# Altium PCB PCB1.PcbDoc
Units mil, origin at the board's own origin, x right, y up, seen from the top; angles counter-clockwise.
Board outline 3937.01 x 2952.76 mil, 2 copper layers (Top Layer, Bottom Layer); 25 components, 22 nets, 111 pads, 4 vias.
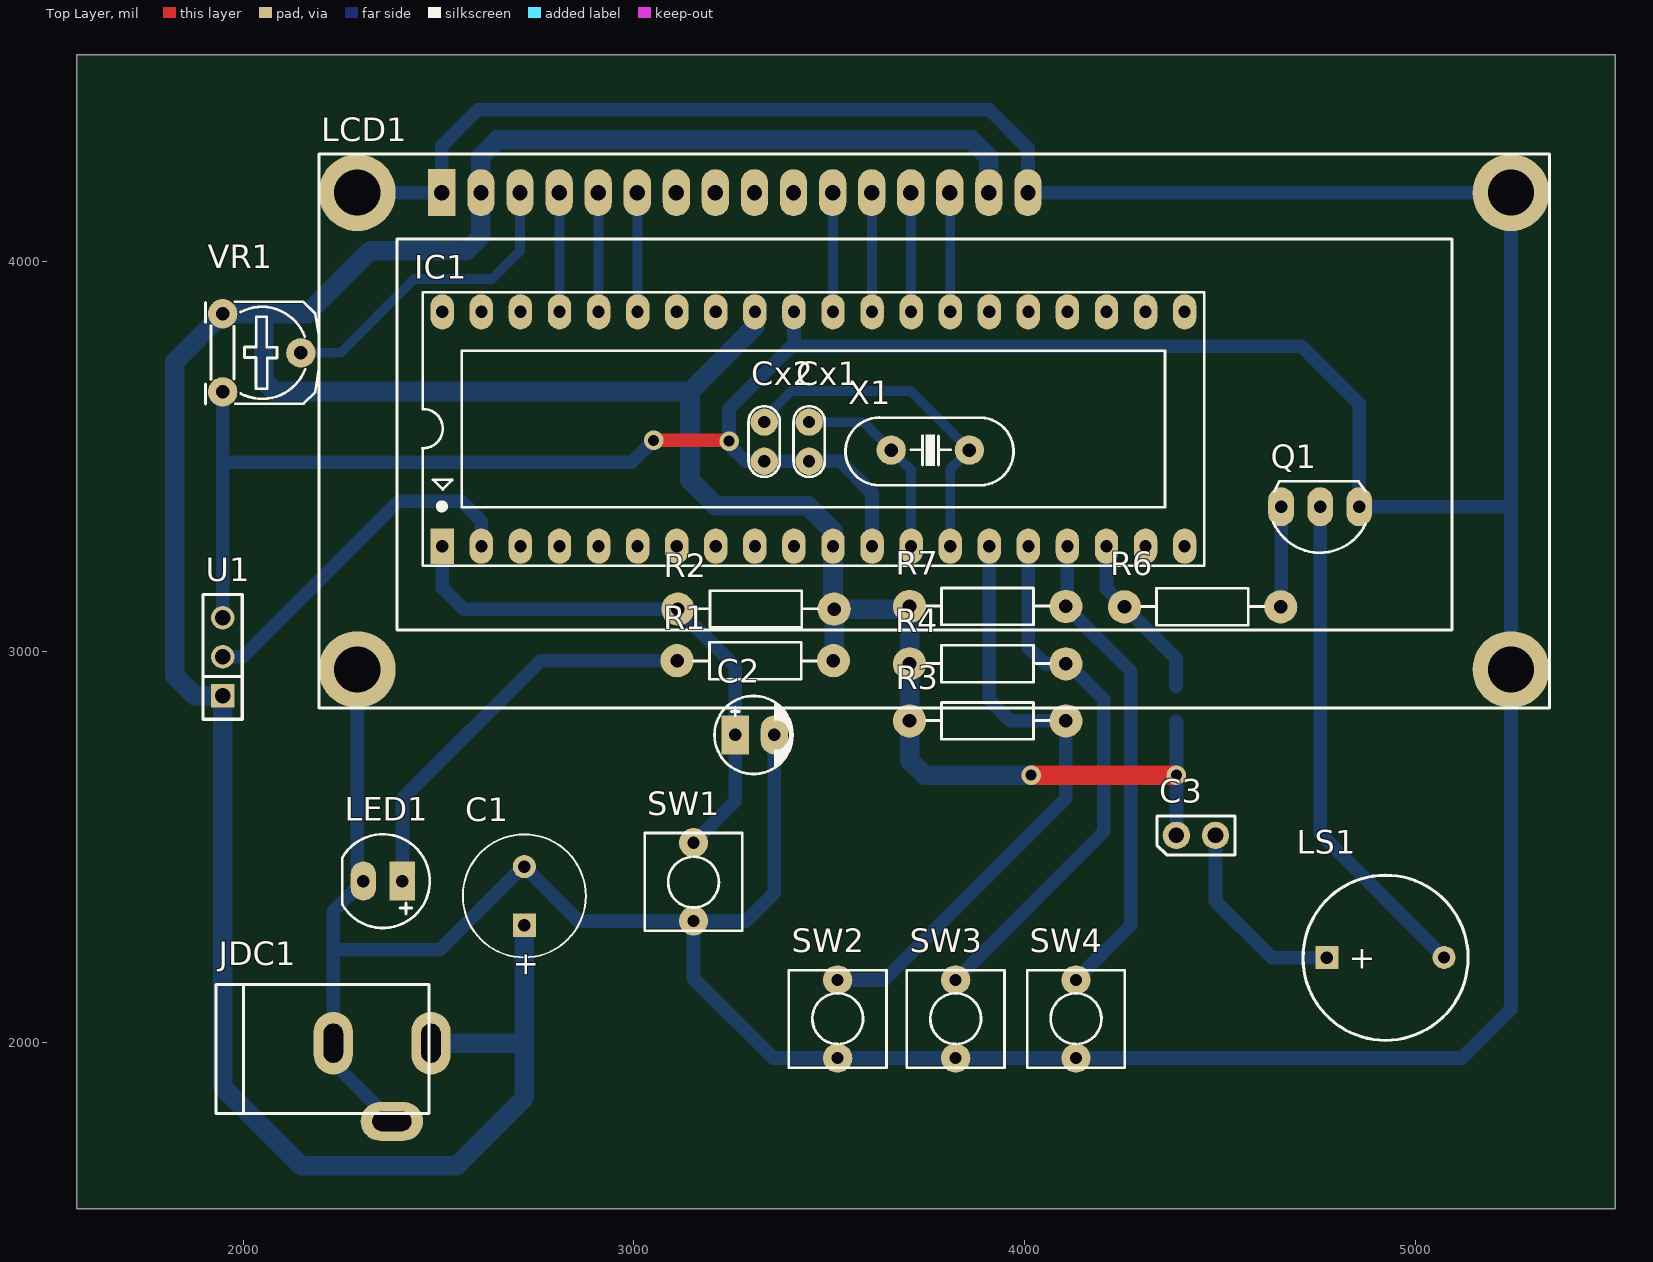
[diagram p0: Top Layer view]
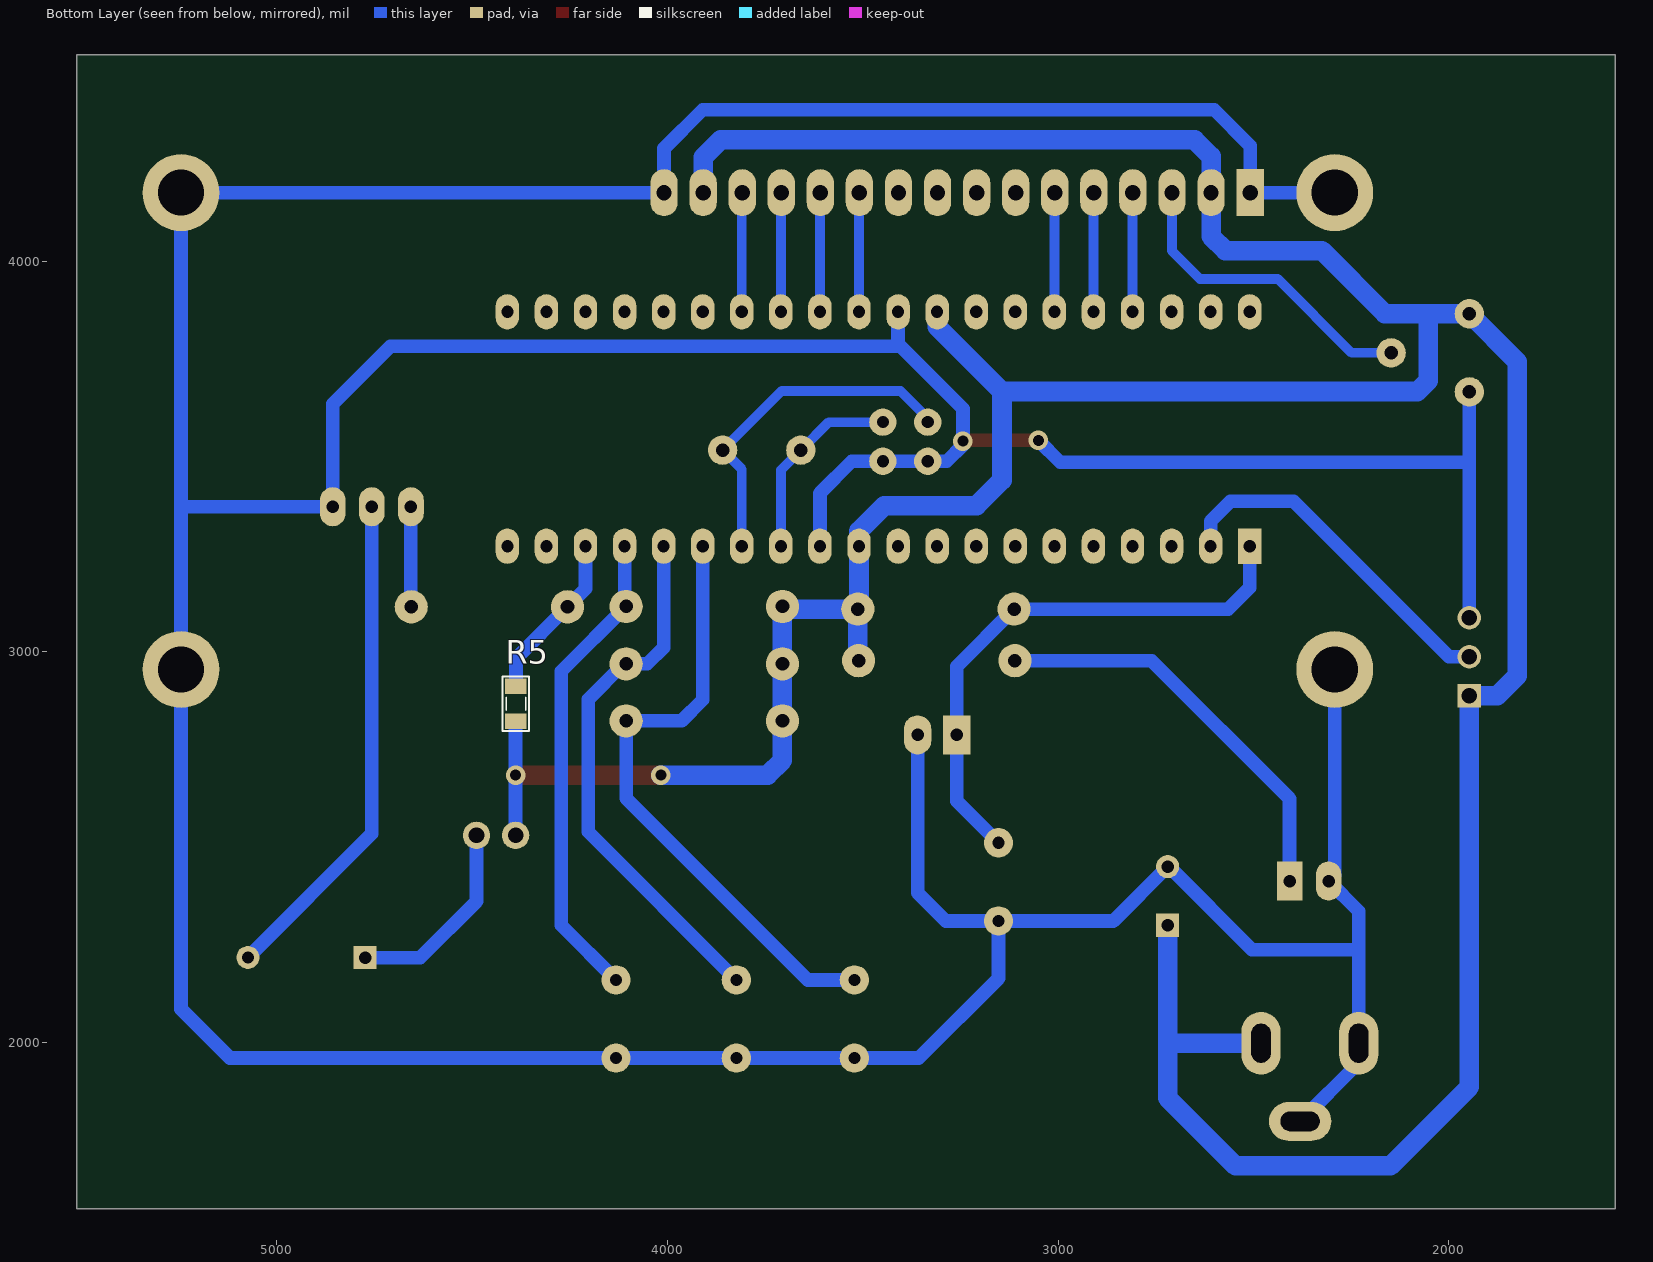
[diagram p1: Bottom Layer view, seen from below]
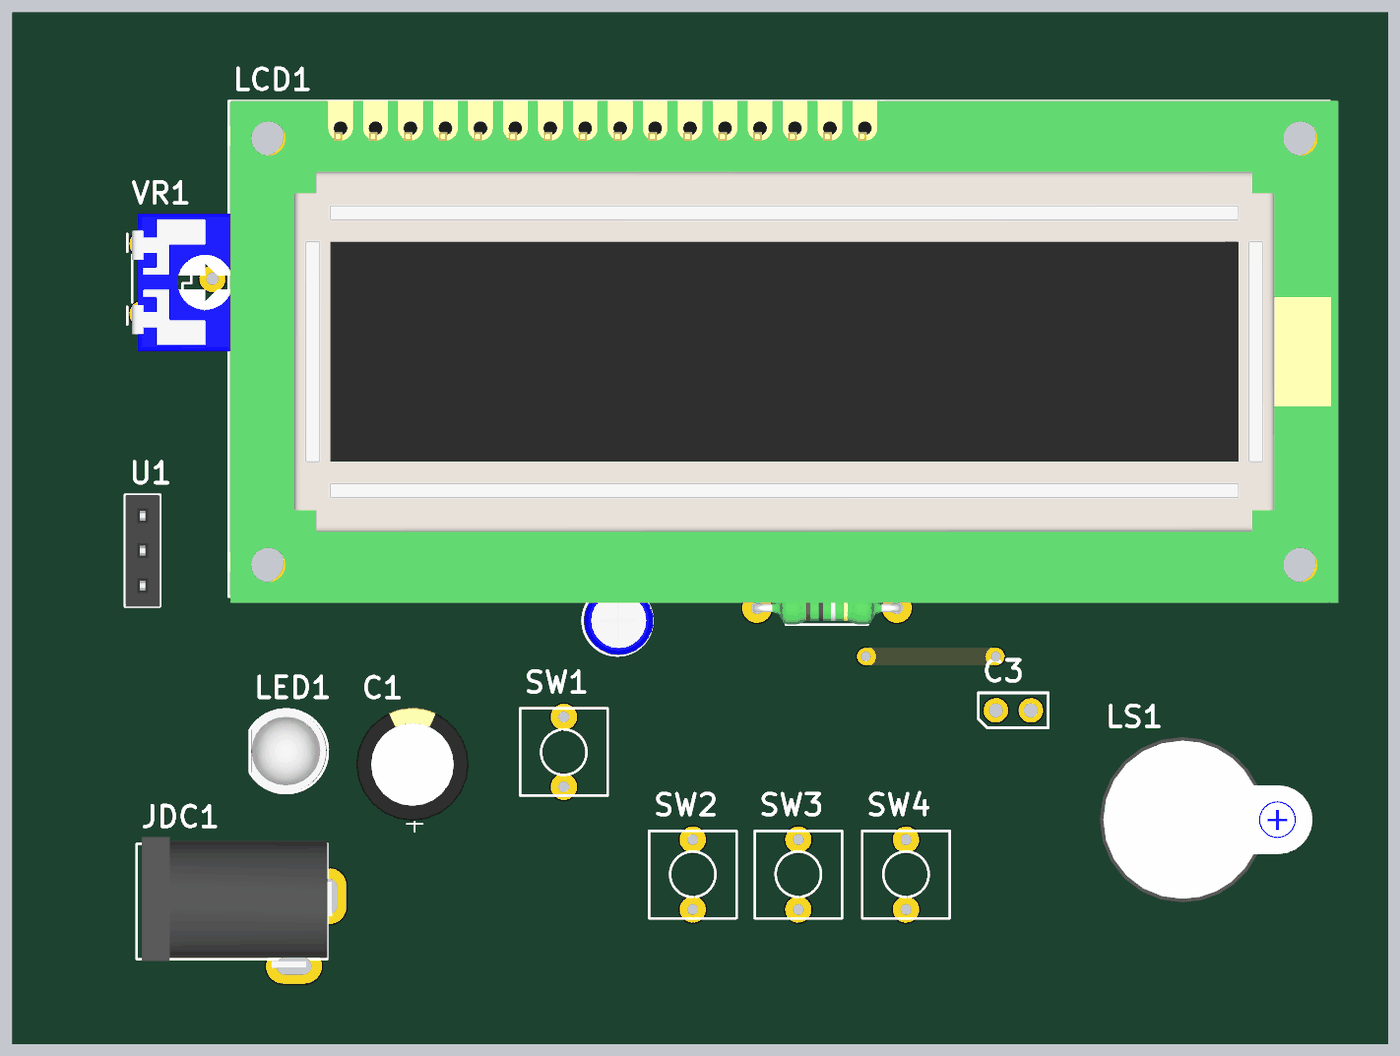
[diagram p2: 3D render of the assembled board from above, using the file's embedded part models]

## Layer stack, top to bottom
Top Solder: solder mask 0.4, Solder Resist, Dk 3.5
Top Layer: signal copper 1.4
Dielectric 1: dielectric 12.6, FR-4, Dk 4.8
Bottom Layer: signal copper 1.4
Bottom Solder: solder mask 0.4, Solder Resist, Dk 3.5

## Board outline
1574.8,4527.56 5511.81,4527.56 5511.81,1574.8 1574.8,1574.8

## Design rules (kind name [scope] priority, off if disabled: settings)
Clearance [All] p1: gap=25 ignorepadtopadclearanceinfootprint=FALSE except(0: Arc-Hole Track-Hole SMDPad-Hole THPad-Hole Via-Hole Fill-Hole Poly-Hole Region-Hole Text-Hole)
DiffPairsRouting [All] p1: maxlimit=10 minlimit=10 mostfreqgap=10 toplayer_minwidth=15 toplayer_maxwidth=15 toplayer_prefwidth=15 bottomlayer_minwidth=15 bottomlayer_maxwidth=15 bottomlayer_prefwidth=15 substack1={BF721E6F-9152-452D-821B-39E06E19F9BE} toplayer_{bf721e6f-9152-452d-821b-39e06e19f9be}_minwidth=15 toplayer_{bf721e6f-9152-452d-821b-39e06e19f9be}_maxwidth=15 toplayer_{bf721e6f-9152-452d-821b-39e06e19f9be}_prefwidth=15 bottomlayer_{bf721e6f-9152-452d-821b-39e06e19f9be}_minwidth=15 bottomlayer_{bf721e6f-9152-452d-821b-39e06e19f9be}_maxwidth=15 bottomlayer_{bf721e6f-9152-452d-821b-39e06e19f9be}_prefwidth=15 maxuncoupledlength=500
PolygonConnect [All] p1: connectstyle=Relief reliefconductorwidth=10 reliefentries=4 polygonreliefangle="90 Angle" airgapwidth=10
RoutingVias [All] p1: holewidth=28 width=50 viastyle="Through Hole" minholewidth=28 minwidth=50 maxholewidth=28 maxwidth=50
SolderMaskExpansion [All] p1: expansion=4 istentingtop=FALSE
Width [All] p1: maxlimit=50 minlimit=25 preferedwidth=35 substack1={BF721E6F-9152-452D-821B-39E06E19F9BE}
29 further rules are at their usual default settings.

## Components (designator, comment, footprint, x,y, rotation, side; value= is the part's Value field where it differs from the comment)
C1 "CN-ALU-DIP" CA-ALU-8 2720,2375 r90 top
C2 "10uF" CP1/2 3260,2787 r0 top
C3 "JP2" JP2-CLOSED 4389,2530 r90 top
Cx1 "22pF" CN1 3449,3537.5 r90 top
Cx2 "22pF" CN1 3334,3537.5 r90 top
IC1 "PIC 16F877A" DIP40/W0.6 2510,3270 r0 top
JDC1 "Jac DC" DC0 2356,1898 r0 top
LCD1 "LCD 16x2A" LCD16X2 2509,4175 r0 top
LED1 "LED" LED-5-RED 2408,2412.92 r180 top
LS1 "Speaker" SPEAKER 4774,2217 r0 top
Q1 "2SC1815" TO92-123 4757,3371 r180 top
R1 "220" RES-1/4W 3326,2972 r0 top
R2 "4k7" RES-1/4W 3298,3114 r180 top
R3 "4k7" RES-1/4W 3891,2828 r180 top
R4 "4k7" RES-1/4W 3891,2974 r180 top
R5 "10k" RES-SMD-0805 4388,2867 r270 bottom
R6 "1k" RES-1/4W 4441,3120 r180 top
R7 "4k7" RES-1/4W 3891,3121 r180 top
SW1 "SW" SW2 3153,2311 r90 top
SW2 "SW" SW2 3522,2160 r270 top
SW3 "SW" SW2 3824,2160 r270 top
SW4 "SW" SW2 4132,2160 r270 top
U1 "LM35" JP3-C1T 1948,2887 r90 top
VR1 "10K" VR-S2 1948,3865 r270 top
X1 "20Mhz" XT2 3759,3516 r180 top

## Footprints (in the part's own frame and the unit in brackets; to place one, negate y for a bottom-side part, rotate by r counter-clockwise, add the part's x,y. Pads: shape width x height; smd on the part's side, far side on the other; paste and mask are expansions set on the pad)
CA-ALU-8 [mm] "Polarized capacitors, Aluminum Electrolytic Capacitors, 2-Leads, Body 8x16x3.5x0.5"
  rect 1.5x1.5 hole 0.8: 1(-1.905,0)
  round 1.5 hole 0.8: 2(1.905,0)
  silkscreen extent -4,-4 4,4, body extent -4.1,-4.1 4.1,4.1, height 14.4
CN1 [mil]
  round 70 hole 31: 1(-50,0) 2(50,0)
  silkscreen extent -90,-40 91,40, body extent -115,-33 115,33, height 265
CP1/2 [mil] "Tu hoa < 22uF/16>50V"
  rect 70x100 hole 32: 1(0,0)
  oval 70x100 hole 32: 2(100,0)
  silkscreen extent -53,-100 147,100, body extent -49,-99 149,99, height 287
DC0 [mil] "Jac DC input"
  oval 100x160 hole 50 slot 100 at 90 deg: 1(125,100) 2(-125,100)
  oval 160x100 hole 50 slot 100 at 0 deg: 3(25,-100)
  silkscreen extent -425,-80 120,250, body extent -410,-105 134,269, height 434
DIP40/W0.6 [mil] "40 PIN, W 600mil, Pin to pin 100mil"
  rect 60x90 hole 31: 1(0,0)
  oval 60x90 hole 31: 2(100,0) 3(200,0) 4(300,0) 5(400,0) 6(500,0) 7(600,0) 8(700,0) 9(800,0) 10(900,0) 11(1000,0) 12(1100,0) 13(1200,0) 14(1300,0) 15(1400,0) 16(1500,0) 17(1600,0) 18(1700,0) 19(1800,0) 20(1900,0) 21(1900,600) 22(1800,600) 23(1700,600) 24(1600,600) 25(1500,600) 26(1400,600) 27(1300,600) 28(1200,600) 29(1100,600) 30(1000,600) 31(900,600) 32(800,600) 33(700,600) 34(600,600) 35(500,600) 36(400,600) 37(300,600) 38(200,600) 39(100,600) 40(0,600)
  silkscreen extent -50,-50 1950,650, body extent -82,-10 1982,600, height 224
JP2-CLOSED [mil]
  round 70 hole 40: 1(0,0) 2(0,-100)
  silkscreen extent -50,-150 50,50, body extent -50,-152 50,50, height 300
JP3-C1T [mm] "3 row, straight, gold plating"
  rect 1.52x1.52 hole 1.02: 1(0,0)
  round 1.52 hole 1.02: 2(2.54,0) 3(5.08,0)
  silkscreen extent -1.52,-1.27 6.6,1.27, body extent -1.52,-1.25 6.6,1.25, height 8.51
LCD16X2 [mm] "LCD dipslay 16x2, 16 pin"
  round 5 hole 3: 1(-5.5,-31) 1(-5.5,0) 1(69.5,-31) 1(69.5,0)
  rect 1.778x3.048 hole 1: 1(0,0)
  oval 1.778x3.048 hole 1: 2(2.54,0) 3(5.08,0) 4(7.62,0) 5(10.16,0) 6(12.7,0) 7(15.24,0) 8(17.78,0) 9(20.32,0) 10(22.86,0) 11(25.4,0) 12(27.94,0) 13(30.48,0) 14(33.02,0) 15(35.56,0) 16(38.1,0)
  round 0 all layers, no hole: ""(-5.5,0)
  silkscreen extent -8,-33.5 72,2.5, body extent -7.87,-33.96 72.64,2.54, height 18.14
LED-5-RED [mil] "LED 2 PIN, 5 ly , Only colour,pin to pin 100mil"
  rect 65x100 hole 32: 1(0,0)
  oval 65x100 hole 32: 2(100,0)
  silkscreen extent -70,-120 154,120, body extent -65,-119 149,118, height 339
RES-1/4W [mil]
  round 85 hole 35: 1(-215,5) 2(185,5)
  silkscreen extent -173,-42 141,52, body extent -227,-42 197,52, height 95
RES-SMD-0805 [mil]
  rect 39.37x55 smd: 1(-45,0) 2(45,0)
  silkscreen extent -70,-34 70,33, body extent -39,-25 39,25, height 31
SPEAKER [mm]
  rect 1.5x1.5 hole 0.8: 1(0,0)
  round 1.5 hole 0.8: 2(7.62,0.013)
  silkscreen extent -1.55,-5.38 9.18,5.36, body extent -2.22,-6 13.24,6, height 4.5
SW2 [mil] "SW button 2pin, 250x 250 mil"
  round 75 hole 31: 1(0,0) 2(200,0)
  silkscreen extent -25,-125 225,125
TO92-123 [mil] "TO-92"
  oval 66x100 hole 32: 1(-100,0) 2(0,0) 3(100,0)
  silkscreen extent -117,-65 120,118, body extent -109,-66 109,95, height 245
VR-S2 [mil] "Resistor Variable"
  round 75 hole 35: 1(0,0) 2(100,200) 3(200,0)
  silkscreen extent -31,-44 231,246, body extent -87,-30 307,372, height 165
XT2 [mil] "Footpin for Crystal 2 pin"
  round 75 hole 34: 1(-100,0) 2(100,0)
  silkscreen extent -213,-83 217,90, body extent -216,-87 216,90, height 144

## Part data
C1: "Capacitor (Semiconductor SIM Model)"
C2: library part CP1, "Cap P  0,1uF < 22uF , 16 - 50V"
C3: "WR-PHD 2.54 mm Angled Socket Header"
Cx1 Cx2: library part CN
IC1: library part PIC16F877-PU, "8K FLASH, 368B RAM, 256B EFROM"
JDC1: library part DCIN, "Jac DC input"
LCD1: library part LCD16x2A, "LCD dipslay 16 char, 2 line"
LED1: "LED Single colour Green and Red"
LS1: "Loudspeaker"
Q1: "NPN 600mW, ECB"
R1 R2 R3 R4 R6 R7: library part Res, "Res"
R5: library part Res-SMD, "Resistor"
SW1 SW2 SW3 SW4: library part SW2, "Switch button 2 pin"
U1: "Teminal"
VR1: library part VR-S, "Var Resistor"
X1: library part XT2, "Crystal, 32.768 KHz, -40 to 85 degC, 3.2 x 1.5 x 0.9 mm SMD"

## Via types
v1: diameter 50, hole 28, Top Layer to Bottom Layer, 4 vias

## Nets (pads, with @x,y where several pads share a name; then routed paths per layer and width w, separated by ;. In a path a pad name is that pad's centre, name@x,y a point inside that pad or via, vN(x,y) a via of type N, cw(c..) or ccw(c..) an arc to the next point about the centre after c; other vN are vias at no path point)
GND: C1.2 C2.2 Cx1.1 Cx2.1 IC1.12 IC1.31 JDC1.2 JDC1.3 LCD1.1 LCD1.16 LED1.2 Q1.1 SW1.1 SW2.2 SW3.2 SW4.2 U1.3 VR1.3 | length 15721.1
  Top Layer w35: v1(3051,3541) 3242,3541 v1(3244,3539)
  Bottom Layer w35: U1.3 1948,3485 ; VR1.3 1948,3485 ; LCD1.1@2292.46,2954.53 2292.46,2428.46 LED1.2 2231,2335.92 2231,2237 ; LCD1.1@2292.46,4175 2509,4175 2509,4295 2601,4387 3910,4387 4009,4288 LCD1.16 5245.22,4175 5245.22,3377 ; JDC1.3 2231,1948 JDC1.2 2231,2237 ; v1(3051,3541) 2995,3485 1948,3485 ; C2.2 3360,2383 3288,2311 SW1.1 ; IC1.31 3410,3788 ; IC1.12 3610,3406 3528.5,3487.5 Cx1.1 Cx2.1 3285.5,3487.5 3244,3529 v1(3244,3539) 3244,3622 3410,3788 ; 2231,2237 2504,2237 2717,2450 C1.2 2859,2311 SW1.1 ; SW1.1 3153,2164 3357,1960 SW2.2 SW3.2 SW4.2 5120,1960 5245.22,2085.22 5245.22,2954.53 5245.22,3377 ; 3410,3788 3416,3782 4709,3782 4857,3634 Q1.1 5239.22,3371 5245.22,3377
NetC3_2: C3.2 LS1.1 | length 513.6
  Bottom Layer w35: C3.2 4489,2361 4633,2217 LS1.1
NetLCD1_3: LCD1.3 VR1.2 | length 818.1
  Bottom Layer w25: VR1.2 2249,3765 2438,3954 2637,3954 2709,4026 LCD1.3
NetLED1_1: LED1.1 R1.1 | length 1060.3
  Bottom Layer w35: LED1.1 2408,2624 2761,2977 R1.1
NetLS1_2: LS1.2 Q1.2 | length 1284.8
  Bottom Layer w35: Q1.2 4757,2534.5 LS1.2
NetQ1_3: Q1.3 R6.1 | length 256.4
  Bottom Layer w35: R6.1 4657,3116 Q1.3
RA0: IC1.2 U1.2 | length 912
  Bottom Layer w35: U1.2 2000,2987 2398,3385 2559,3385 2610,3334 IC1.2
RB2: IC1.35 LCD1.6 | length 305.4
  Bottom Layer w25: LCD1.6 3010,4174 IC1.35
RB3: IC1.36 LCD1.5 | length 305.4
  Bottom Layer w25: LCD1.5 2910,4174 IC1.36
RB4: IC1.37 LCD1.4 | length 305.4
  Bottom Layer w25: LCD1.4 2810,4174 IC1.37
RC0: IC1.15 R3.1 SW2.1 | length 1586
  Bottom Layer w35: SW2.1 3641,2160 4106,2625 R3.1 3964,2823 3910,2877 IC1.15
RC1: IC1.16 R4.1 SW3.1 | length 1382.1
  Bottom Layer w35: SW3.1 4203,2539 4203,2878 4112,2969 R4.1 4052,2969 4010,3011 IC1.16
RC2: IC1.17 R7.1 SW4.1 | length 1238.4
  Bottom Layer w35: IC1.17 4110,3120 R7.1 4272,2950 4272,2300 SW4.1
RC3: IC1.18 R5.1 R6.2 | length 431.7
  Bottom Layer w35: IC1.18 4210,3161 R6.2 4388,2983 R5.1
RD4: IC1.27 LCD1.14 | length 305.4
  Bottom Layer w25: LCD1.14 3810,4174 IC1.27
RD5: IC1.28 LCD1.13 | length 305.4
  Bottom Layer w25: LCD1.13 3710,4174 IC1.28
RD6: IC1.29 LCD1.12 | length 305.4
  Bottom Layer w25: LCD1.12 3610,4174 IC1.29
RD7: IC1.30 LCD1.11 | length 305.4
  Bottom Layer w25: LCD1.11 3510,4174 IC1.30
RST: C2.1 IC1.1 R2.2 SW1.2 | length 1435
  Bottom Layer w35: IC1.1 2510,3164 2565,3109 R2.2 3260,2962 C2.1 3260,2618 SW1.2
VCC: C1.1 C3.1 IC1.11 IC1.32 JDC1.1 LCD1.2 LCD1.15 R1.2 R2.1 R3.2 R4.2 R5.2 R7.2 U1.1 VR1.1 | length 10216.5
  Top Layer w50: v1(4017,2684) v1(4389,2684)
  Bottom Layer w35: R5.2 4389,2821 v1(4389,2684) C3.1
  Bottom Layer w50: JDC1.1 2713,1998 2720,2005 ; C1.1 2720,2005 ; IC1.32 3310,3832 3144,3666 ; R1.2 3513,2979 R2.1 ; LCD1.15 3909,4265 3864,4310 2651,4310 2609,4268 LCD1.2 2609,4063 2572.57,4026.57 2325.57,4026.57 2164,3865 2053,3865 ; v1(4017,2684) 3744,2684 3706,2722 R3.2 R4.2 R7.2 3699,3109 R2.1 ; 2053,3865 VR1.1 1825,3742 1825,2939 1877,2887 U1.1 1948,1886 2150,1684 2546,1684 2720,1858 2720,2005 ; 2053,3865 2053,3694 2081,3666 3144,3666 ; 3144,3666 3144,3439 3209,3374 3445,3374 3510,3309 IC1.11 3510,3112 R2.1
XT1: Cx1.2 IC1.13 X1.2 | length 506.7
  Bottom Layer w25: Cx1.2 3587.5,3587.5 X1.2 3710,3465 IC1.13
XT2: Cx2.2 IC1.14 X1.1 | length 892.3
  Bottom Layer w25: Cx2.2 3334,3597 3404,3667 3708,3667 X1.1 3810,3467 IC1.14
pads on no net: IC1.3 IC1.4 IC1.5 IC1.6 IC1.7 IC1.8 IC1.9 IC1.10 IC1.19 IC1.20 IC1.21 IC1.22 IC1.23 IC1.24 IC1.25 IC1.26 IC1.33 IC1.34 IC1.38 IC1.39 IC1.40 LCD1. LCD1.7 LCD1.8 LCD1.9 LCD1.10

## Text inside footprints (layer, text, board x,y; h text height)
C1: Top Overlay "+" at 2749.02,2165.35 h59.06 r90
LS1: Top Overlay "+" at 4829.5,2189 h60